# Altium PCB ArduinoUnoShield.PcbDoc
Units mil, origin at the board's own origin, x right, y up, seen from the top; angles counter-clockwise.
Board outline 2700 x 2100 mil, 2 copper layers (Top Layer, Bottom Layer); 14 components, 36 nets, 69 pads, 0 vias.
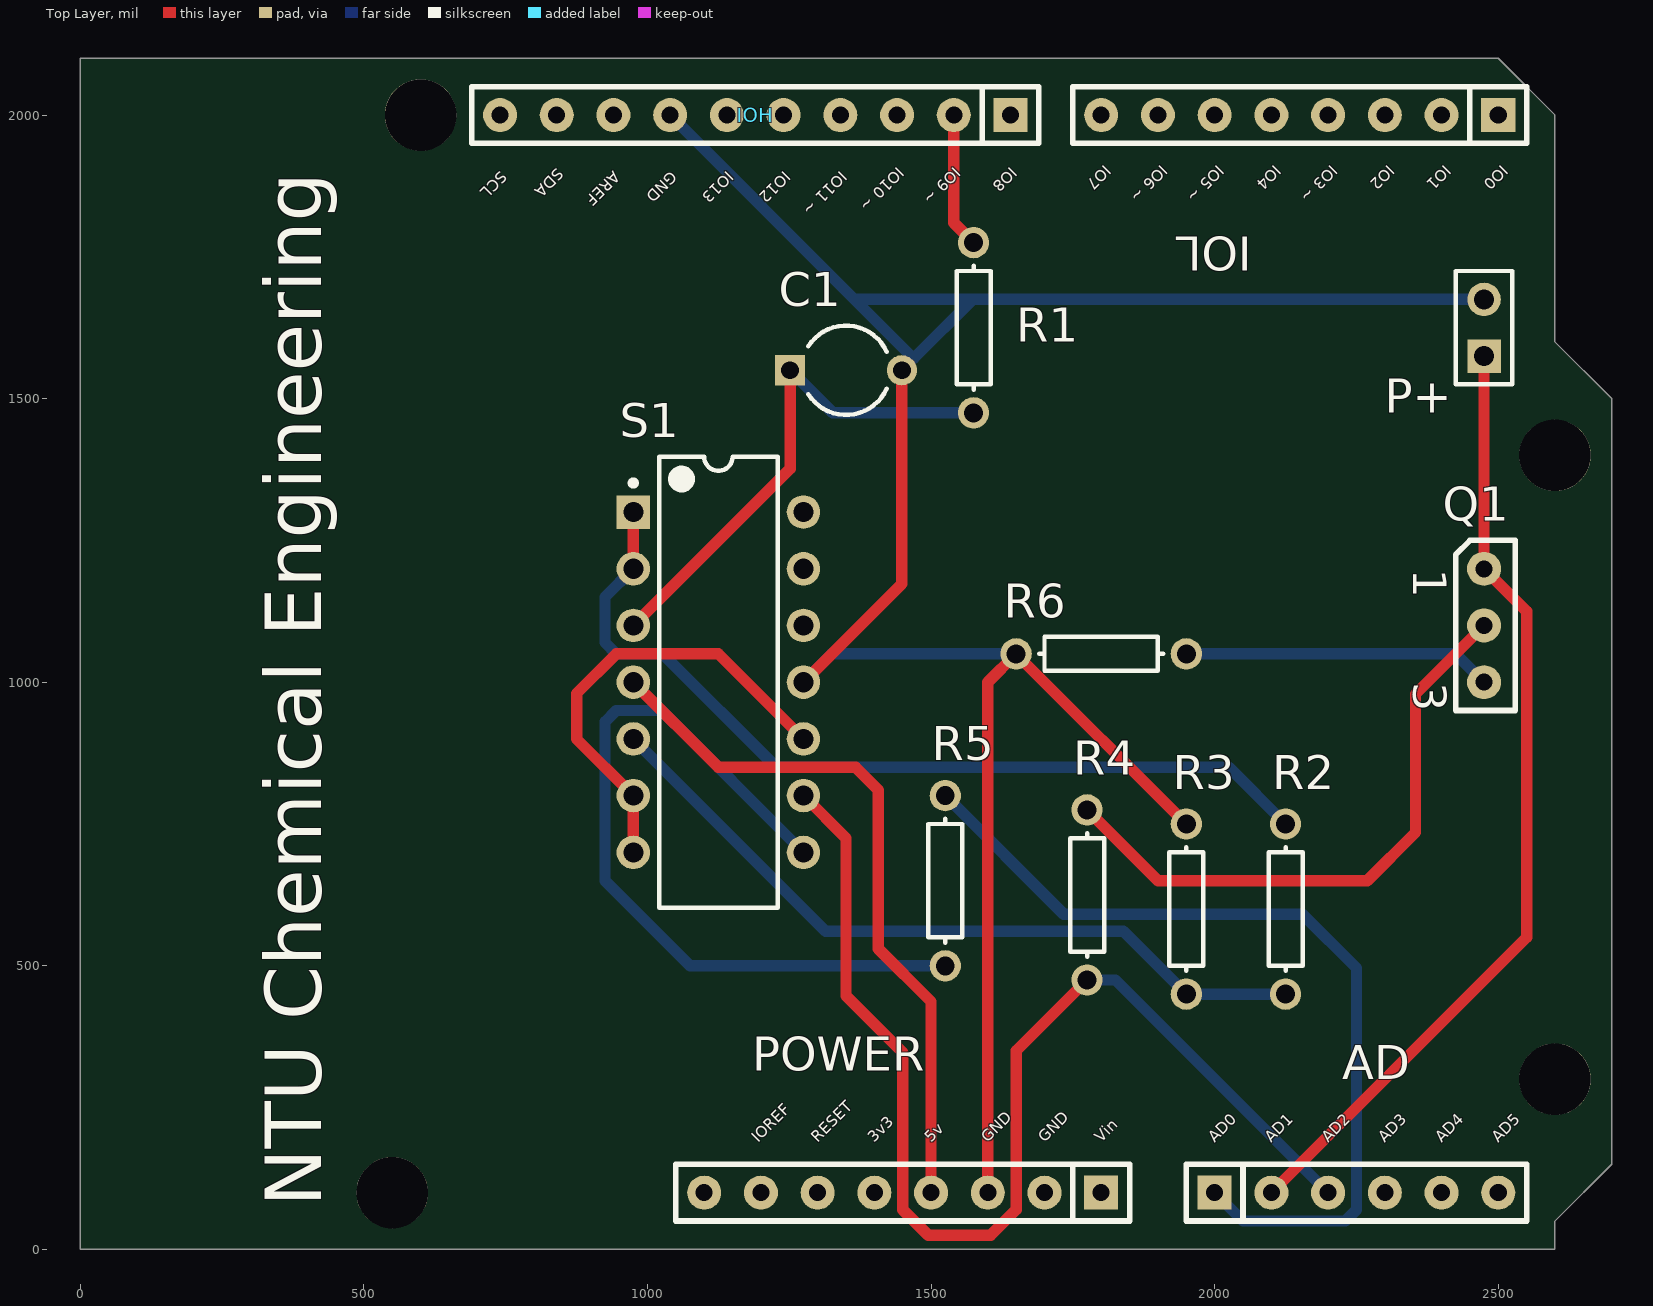
[diagram p0: Top Layer view]
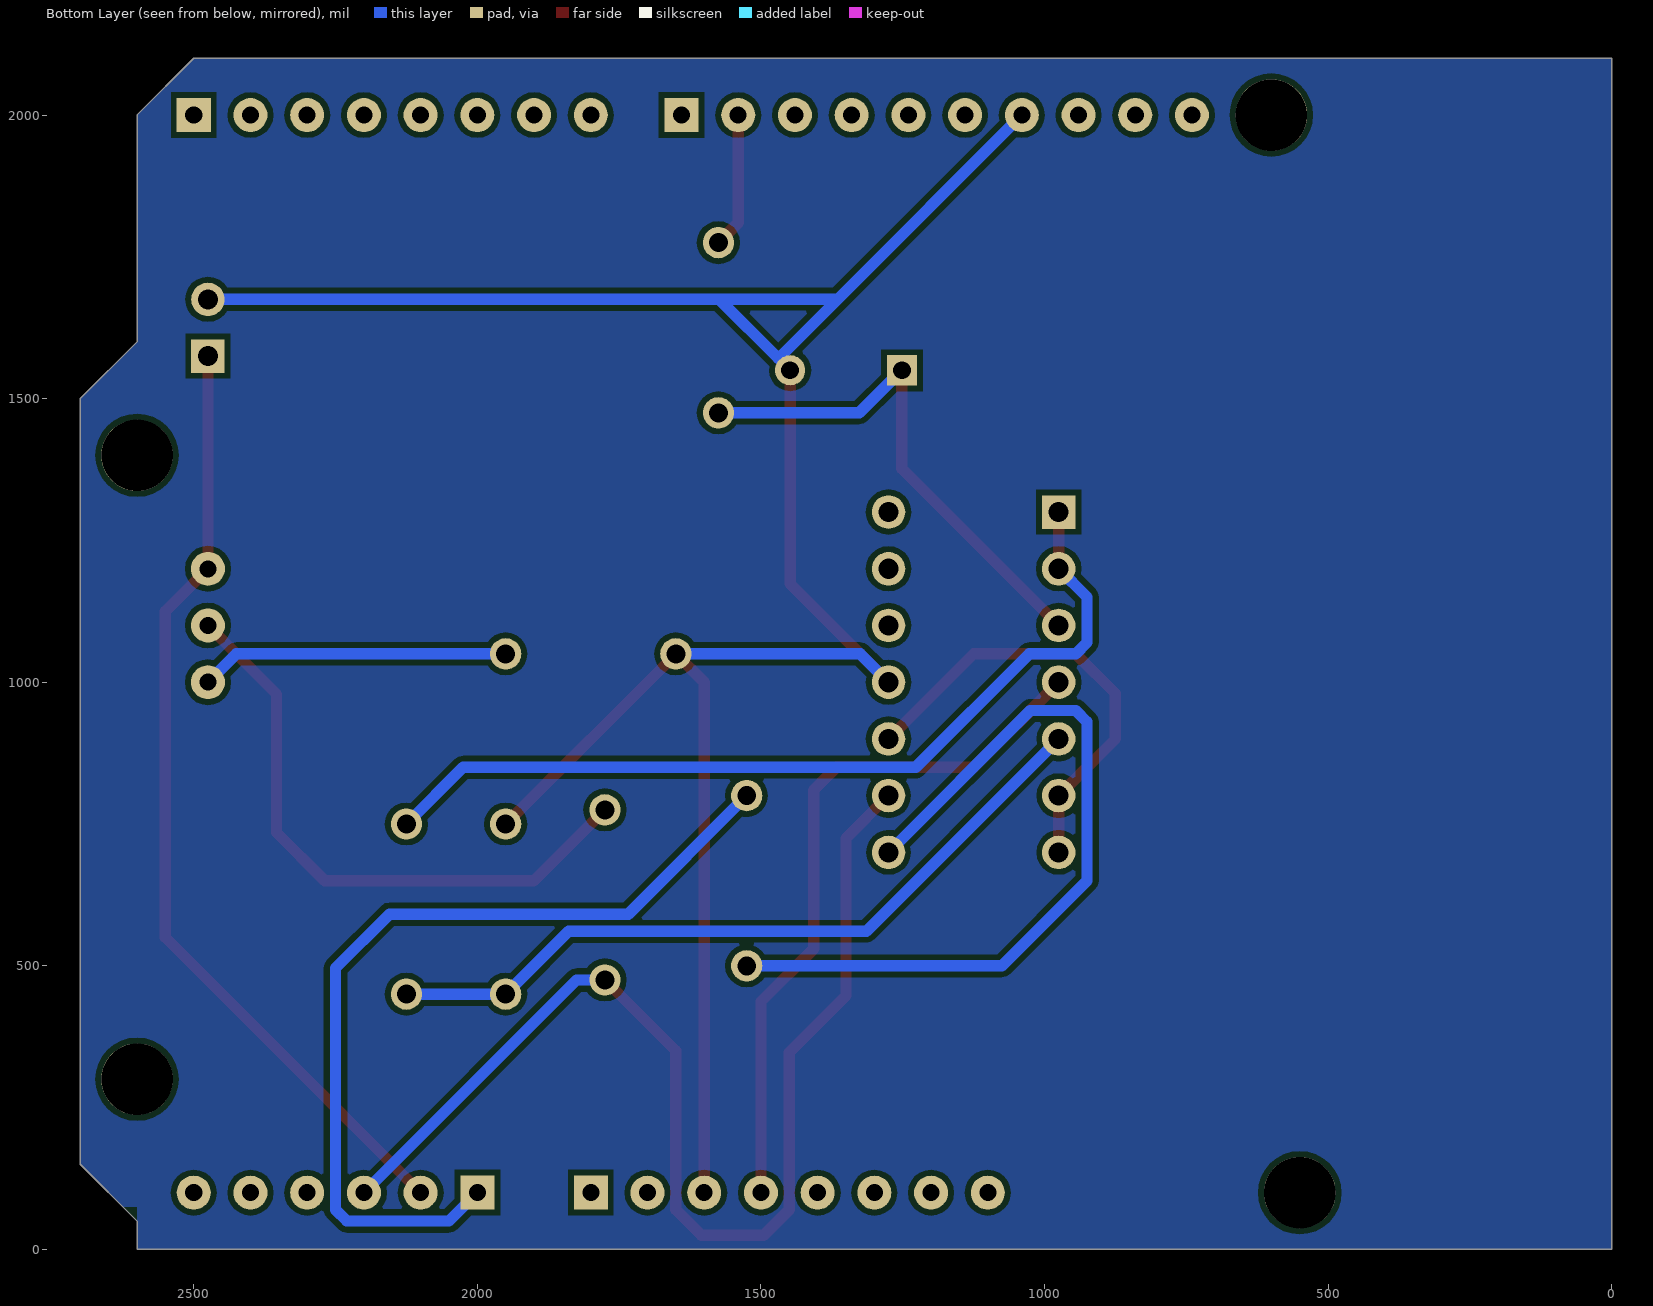
[diagram p1: Bottom Layer view, seen from below]

## Layer stack, top to bottom
Top Solder: solder mask 0.4, Solder Resist, Dk 3.5
Top Layer: signal copper 1.4
Dielectric1: dielectric 12.6, FR-4, Dk 4.8
Bottom Layer: signal copper 1.4
Bottom Solder: solder mask 0.4, Solder Resist, Dk 3.5

## Board outline
0,0 0,2100 2500,2100 2600,2000 2600,1600 2700,1500 2700,150 2600,50 2600,0

## Design rules (kind name [scope] priority, off if disabled: settings)
Clearance [All] p1: gap=10
PolygonConnect [All] p1: connectstyle=Relief reliefconductorwidth=10 reliefentries=4 polygonreliefangle="90 Angle" airgapwidth=10
RoutingVias [All] p1: holewidth=28 width=50 viastyle="Through Hole" minholewidth=28 minwidth=50 maxholewidth=28 maxwidth=50
SilkToSolderMaskClearance SilkscreenOverComponentPads [IsPad] p1: minsilkscreentomaskgap=10 clearancetoexposedcopper=TRUE
SolderMaskExpansion [All] p1: expansion=4
Width [All] p1: maxlimit=30 minlimit=10 preferedwidth=20
29 further rules are at their usual default settings.

## Components (designator, comment, footprint, x,y, rotation, side; value= is the part's Value field where it differs from the comment)
AD "AD" "Header 6x1 8.5mm" 2000,100 r0 top locked
C1 "Cap2" CAPR5-4X5 1350,1550 r0 top
IOH "IOH" "Header 10x1 8.5mm" 1640,2000 r180 top locked
IOL "IOL" "Header 8x1 8.5mm" 2500,2000 r180 top locked
P+ "Header 2" HDR1X2 2475,1575 r90 top (schematic designator P?)
POWER "POWER_UNO" "Header 8x1 8.5mm" 1800,100 r180 top locked
Q1 "MOSFET-N" PCBComponent_1 2475,1200 r270 top
R1 "Res1" AXIAL-0.3 1575,1625 r270 top
R2 "Res1" AXIAL-0.3 2125,600 r90 top
R3 "Res1" AXIAL-0.3 1950,600 r90 top
R4 "Res1" AXIAL-0.3 1775,625 r270 top
R5 "Res1" AXIAL-0.3 1525,650 r90 top
R6 "Res1" AXIAL-0.3 1800,1050 r180 top
S1 "SW DIP-7" DIP-14 1125,1000 r0 top

## Footprints (in the part's own frame and the unit in brackets; to place one, negate y for a bottom-side part, rotate by r counter-clockwise, add the part's x,y. Pads: shape width x height; smd on the part's side, far side on the other; paste and mask are expansions set on the pad)
AXIAL-0.3 [mm] "Axial Device, Thru-Hole; 2 Leads; 0.3 in Pin Spacing"
  round 1.4 hole 0.85: 1(-3.81,0) 2(3.81,0)
  silkscreen extent -2.77,-0.76 2.77,0.76
CAPR5-4X5 [mm] "Capacitor; 2 Leads"
  rect 1.35x1.35 hole 0.8: 1(-2.5,0)
  round 1.35 hole 0.8: 2(2.5,0)
  silkscreen extent -1.69,-2 1.82,2
DIP-14 [mm] "DIP; 14 Leads; Row Spacing 7.62 mm; Pitch 2.54 mm"
  rect 1.5x1.5 hole 0.9: 1(-3.81,7.62)
  round 1.5 hole 0.9: 2(-3.81,5.08) 3(-3.81,2.54) 4(-3.81,0) 5(-3.81,-2.54) 6(-3.81,-5.08) 7(-3.81,-7.62) 8(3.81,-7.62) 9(3.81,-5.08) 10(3.81,-2.54) 11(3.81,0) 12(3.81,2.54) 13(3.81,5.08) 14(3.81,7.62)
  silkscreen extent -3.93,-10.1 2.65,10.1, body extent -3.6,-10.1 3.6,10.1, height 5.08
HDR1X2 [mm] "Connector; Header; 2 Position"
  rect 1.5x1.5 hole 0.9: 1(0,0)
  round 1.5 hole 0.9: 2(2.54,0)
  silkscreen extent -1.27,-1.27 3.81,1.27
"Header 6x1 8.5mm" [mil] "Stackable 6 pin header"
  rect 60x60 hole 30: 1(0,0)
  round 60 hole 30: 2(100,0) 3(200,0) 4(300,0) 5(400,0) 6(500,0)
  silkscreen extent -50,-50 550,50, body extent -50,-50 550,50, height 335
"Header 8x1 8.5mm" [mil] "Stackable 8 pin header"
  rect 60x60 hole 30: 1(0,0)
  round 60 hole 30: 2(100,0) 3(200,0) 4(300,0) 5(400,0) 6(500,0) 7(600,0) 8(700,0)
  silkscreen extent -50,-50 750,50, body extent -50,-50 750,50, height 335
"Header 10x1 8.5mm" [mil] "Stackable 10 pin header"
  rect 60x60 hole 30: 1(0,0)
  round 60 hole 30: 2(100,0) 3(200,0) 4(300,0) 5(400,0) 6(500,0) 7(600,0) 8(700,0) 9(800,0) 10(900,0)
  silkscreen extent -50,-50 950,50, body extent -50,-50 950,50, height 335
PCBComponent_1 [mil]
  round 60 hole 30: 1(0,0) 2(100,0) 3(200,0)
  silkscreen extent -50,-50 250,55

## Part data
C1: "Capacitor"
P+: "Header, 2-Pin"
Q1: "N-Channel MOSFET"
R1 R2 R3 R4 R5 R6: "Resistor"
S1: "DIP Switch, 7 Position, SPST"

## Free pads (board coordinates)
  round 125.98 hole 125.98: 0(550,100) 0(600,2000) 0(2600,300) 0(2600,1400)

## Nets (pads, with @x,y where several pads share a name; then routed paths per layer and width w, separated by ;. In a path a pad name is that pad's centre, name@x,y a point inside that pad or via, vN(x,y) a via of type N, cw(c..) or ccw(c..) an arc to the next point about the centre after c; other vN are vias at no path point)
3V3: POWER.5
5V: POWER.4 S1.4 | length 1259.2
  Top Layer w20: S1.4 1125,850 1367,850 1407,810 1407,530 1500,437 POWER.4
AD0: AD.1 R5.2 | length 1555.9
  Bottom Layer w20: R5.2 1734,591 2155,591 2250,496 2250,70 2230,50 2050,50 AD.1
AD1: AD.2 P+.1 Q1.1 | length 1692.5
  Top Layer w20: AD.2 2550,550 2550,1125 Q1.1 P+.1
AD2: AD.3 R4.2 S1.9 | length 2076.9
  Top Layer w20: S1.9 1350,725 1350,447.21 1450,347.21 1450,70 1495,25 1605,25 1650,70 1650,350 R4.2
  Bottom Layer w20: R4.2 1825,475 AD.3
AD3: AD.4
AD4: AD.5
AD5: AD.6
AREF: IOH.8
GND: C1.2 IOH.7 P+.2 POWER.3 R3.2 R6.2 S1.11 | length 4765.9
  Top Layer w20: S1.11 1448.43,1173.43 C1.2 ; POWER.3 1600,1000 R6.2 R3.2
  Bottom Layer w20: S1.11 1325,1050 R6.2 ; C1.2 1469.21,1570.79 ; P+.2 1573.43,1675 ; 1365,1675 1573.43,1675 ; 1365,1675 1469.21,1570.79 ; 1365,1675 IOH.7 1365,1675 ; 1469.21,1570.79 1573.43,1675
IO0: IOL.1
IO1: IOL.2
IO2: IOL.3
IO3: IOL.4
IO4: IOL.5
IO5: IOL.6
IO6: IOL.7
IO7: IOL.8
IO8: IOH.1
IO9: IOH.2 R1.1 | length 239.5
  Top Layer w20: IOH.2 1540,1810 R1.1
IO10: IOH.3
IO11: IOH.4
IO12: IOH.5
IO13: IOH.6
IOREF: POWER.7
NetC1_1: C1.1 R1.2 S1.3 | length 919.1
  Top Layer w20: S1.3 1251.57,1376.57 C1.1
  Bottom Layer w20: C1.1 1326.57,1475 R1.2
NetQ1_2: Q1.2 R4.1 | length 1081.1
  Top Layer w20: R4.1 1900,650 2269,650 2354,735 2354,979 Q1.2
NetQ1_3: Q1.3 R6.1 | length 545.7
  Bottom Layer w20: R6.1 2425,1050 Q1.3
NetR2_1: R2.1 R3.1 S1.5 | length 1336.4
  Bottom Layer w20: S1.5 1314,561 1839,561 R3.1 R2.1
NetR2_2: R2.2 S1.1 S1.2 | length 1583.3
  Top Layer w20: S1.2 S1.1
  Bottom Layer w20: S1.2 925,1150 925,1070 945,1050 1027,1050 1227,850 2025,850 R2.2
NetR5_1: R5.1 S1.8 | length 1404
  Bottom Layer w20: S1.8 1025,950 945,950 925,930 925,650 1075,500 R5.1
NetS1_6: S1.6 S1.7 S1.10 | length 812.5
  Top Layer w20: S1.7 S1.6 875,900 875,980 945,1050 1125,1050 S1.10
RESET: POWER.6
SCL: IOH.10
SDA: IOH.9
VIN: POWER.1
pads on no net: POWER.2 POWER.8 S1.12 S1.13 S1.14

## Polygon pours and split planes (outlines as drawn)
no net on Bottom Layer "Multi-Layer-No Net" (solid, pour order 11): 0,0 0,2100 2500,2100 2600,2000 2600,1600 2700,1500 2700,150 2625,75 2600,75 2600,0 0,0

## Silkscreen, mask and mechanical layers (free items; w line width, h text height)
Top Overlay:
  text "IO7" at 1805,1912.93 h20 r225
  text "IO6 ~" at 1905,1912.93 h20 r225
  text "IO5 ~" at 2005,1912.93 h20 r225
  text "IO4" at 2105,1912.93 h20 r225
  text "IO3 ~" at 2205,1912.93 h20 r225
  text "IO2" at 2305,1912.93 h20 r225
  text "IO1" at 2405,1912.93 h20 r225
  text "IO0" at 2505,1912.93 h20 r225
  text "IO10 ~" at 1440,1910 h20 r225
  text "IO9 ~" at 1540,1910 h20 r225
  text "IO8" at 1640,1910 h20 r225
  text "SDA" at 840,1907.93 h20 r225
  text "SCL" at 740,1902.93 h20 r225
  text "AREF" at 940,1902.93 h20 r225
  text "GND" at 1040,1902.93 h20 r225
  text "IO13" at 1140,1902.93 h20 r225
  text "IO12" at 1240,1902.93 h20 r225
  text "IO11 ~" at 1340,1902.93 h20 r225
  text "IOREF" at 1195,187.07 h20 r45
  text "RESET" at 1300,187.07 h20 r45
  text "3v3" at 1400,187.07 h20 r45
  text "5v" at 1500,187.07 h20 r45
  text "GND" at 1600,187.07 h20 r45
  text "GND" at 1700,187.07 h20 r45
  text "Vin" at 1800,187.07 h20 r45
  text "AD0" at 2000,187.07 h20 r45
  text "AD1" at 2100,187.07 h20 r45
  text "AD2" at 2200,187.07 h20 r45
  text "AD3" at 2300,187.07 h20 r45
  text "AD4" at 2400,187.07 h20 r45
  text "AD5" at 2500,187.07 h20 r45
  text "NTU Chemical Engineering" at 425,75 h100 r90
  text "RESET" at 1295,-2515 h20 r45
  text "3v3" at 1395,-2515 h20 r45
  text "5v" at 1495,-2515 h20 r45
  text "GND" at 1595,-2515 h20 r45
  text "GND" at 1695,-2515 h20 r45
  text "Vin" at 1795,-2515 h20 r45
Mechanical 1:
  circle w5: c2600,1400 r62.99
  circle w5: c550,100 r62.99
  circle w5: c2600,300 r62.99
  circle w5: c600,2000 r62.99
  lines w5: 0,0 2600,0 2600,50 2700,150 2700,1500 2600,1600 2600,2000 2500,2100 0,2100 0,0

## Text inside footprints (layer, text, board x,y; h text height)
Q1: Top Overlay "1" at 2350,1200 h59.05 r270; Top Overlay "3" at 2350,1000 h59.05 r270